# Altium PCB 0-PCB1.PcbDoc
Units mil, origin at the board's own origin, x right, y up, seen from the top; angles counter-clockwise.
Board outline 1908.3 x 1908.3 mil, 2 copper layers (Top Layer, Bottom Layer); 29 components, 33 nets, 249 pads, 32 vias.
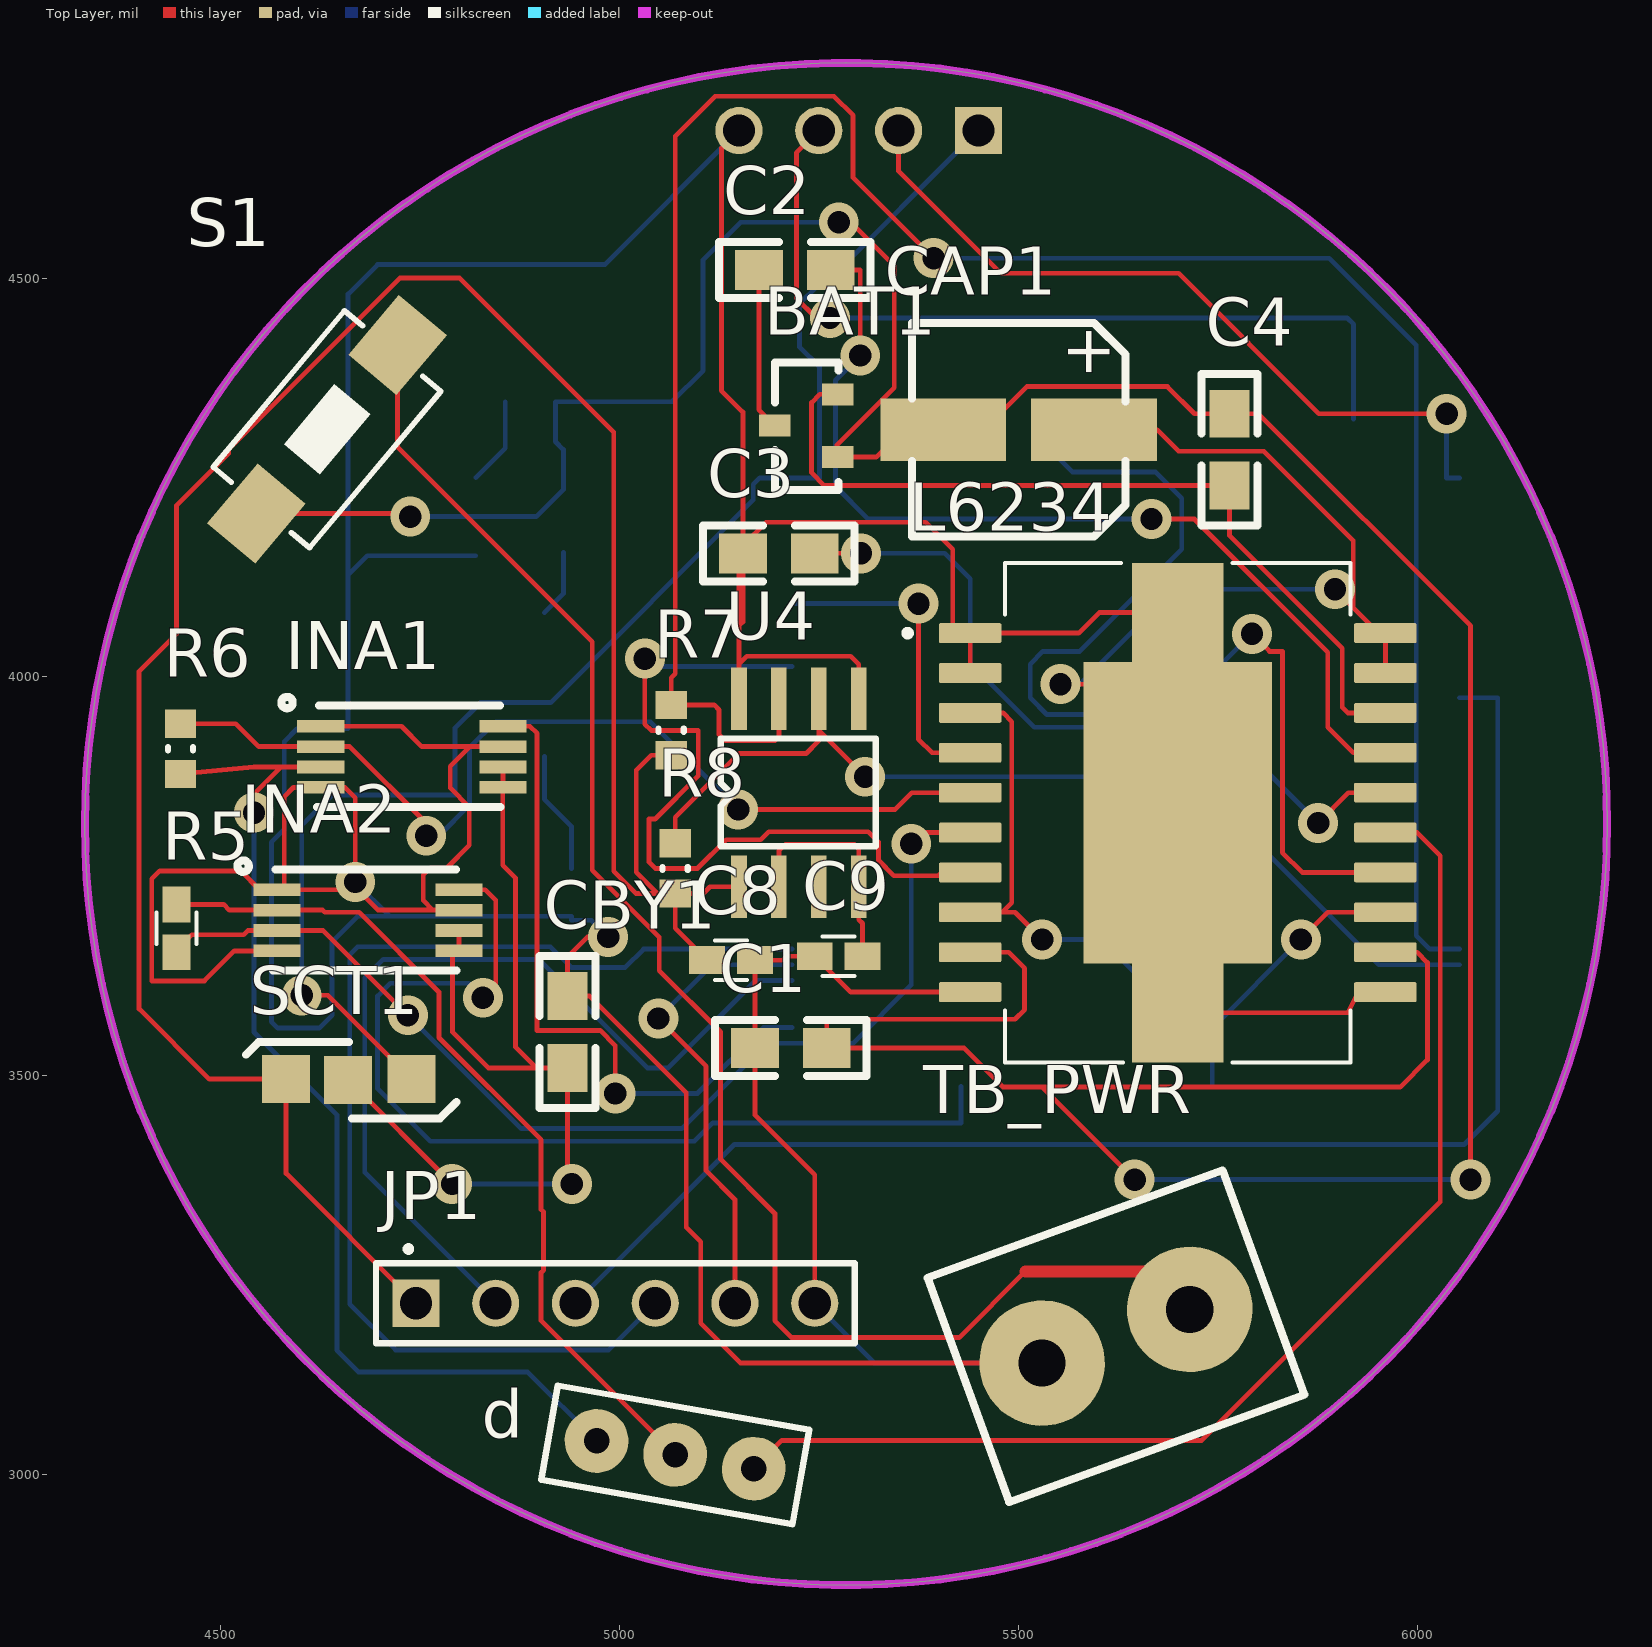
[diagram p0: Top Layer view]
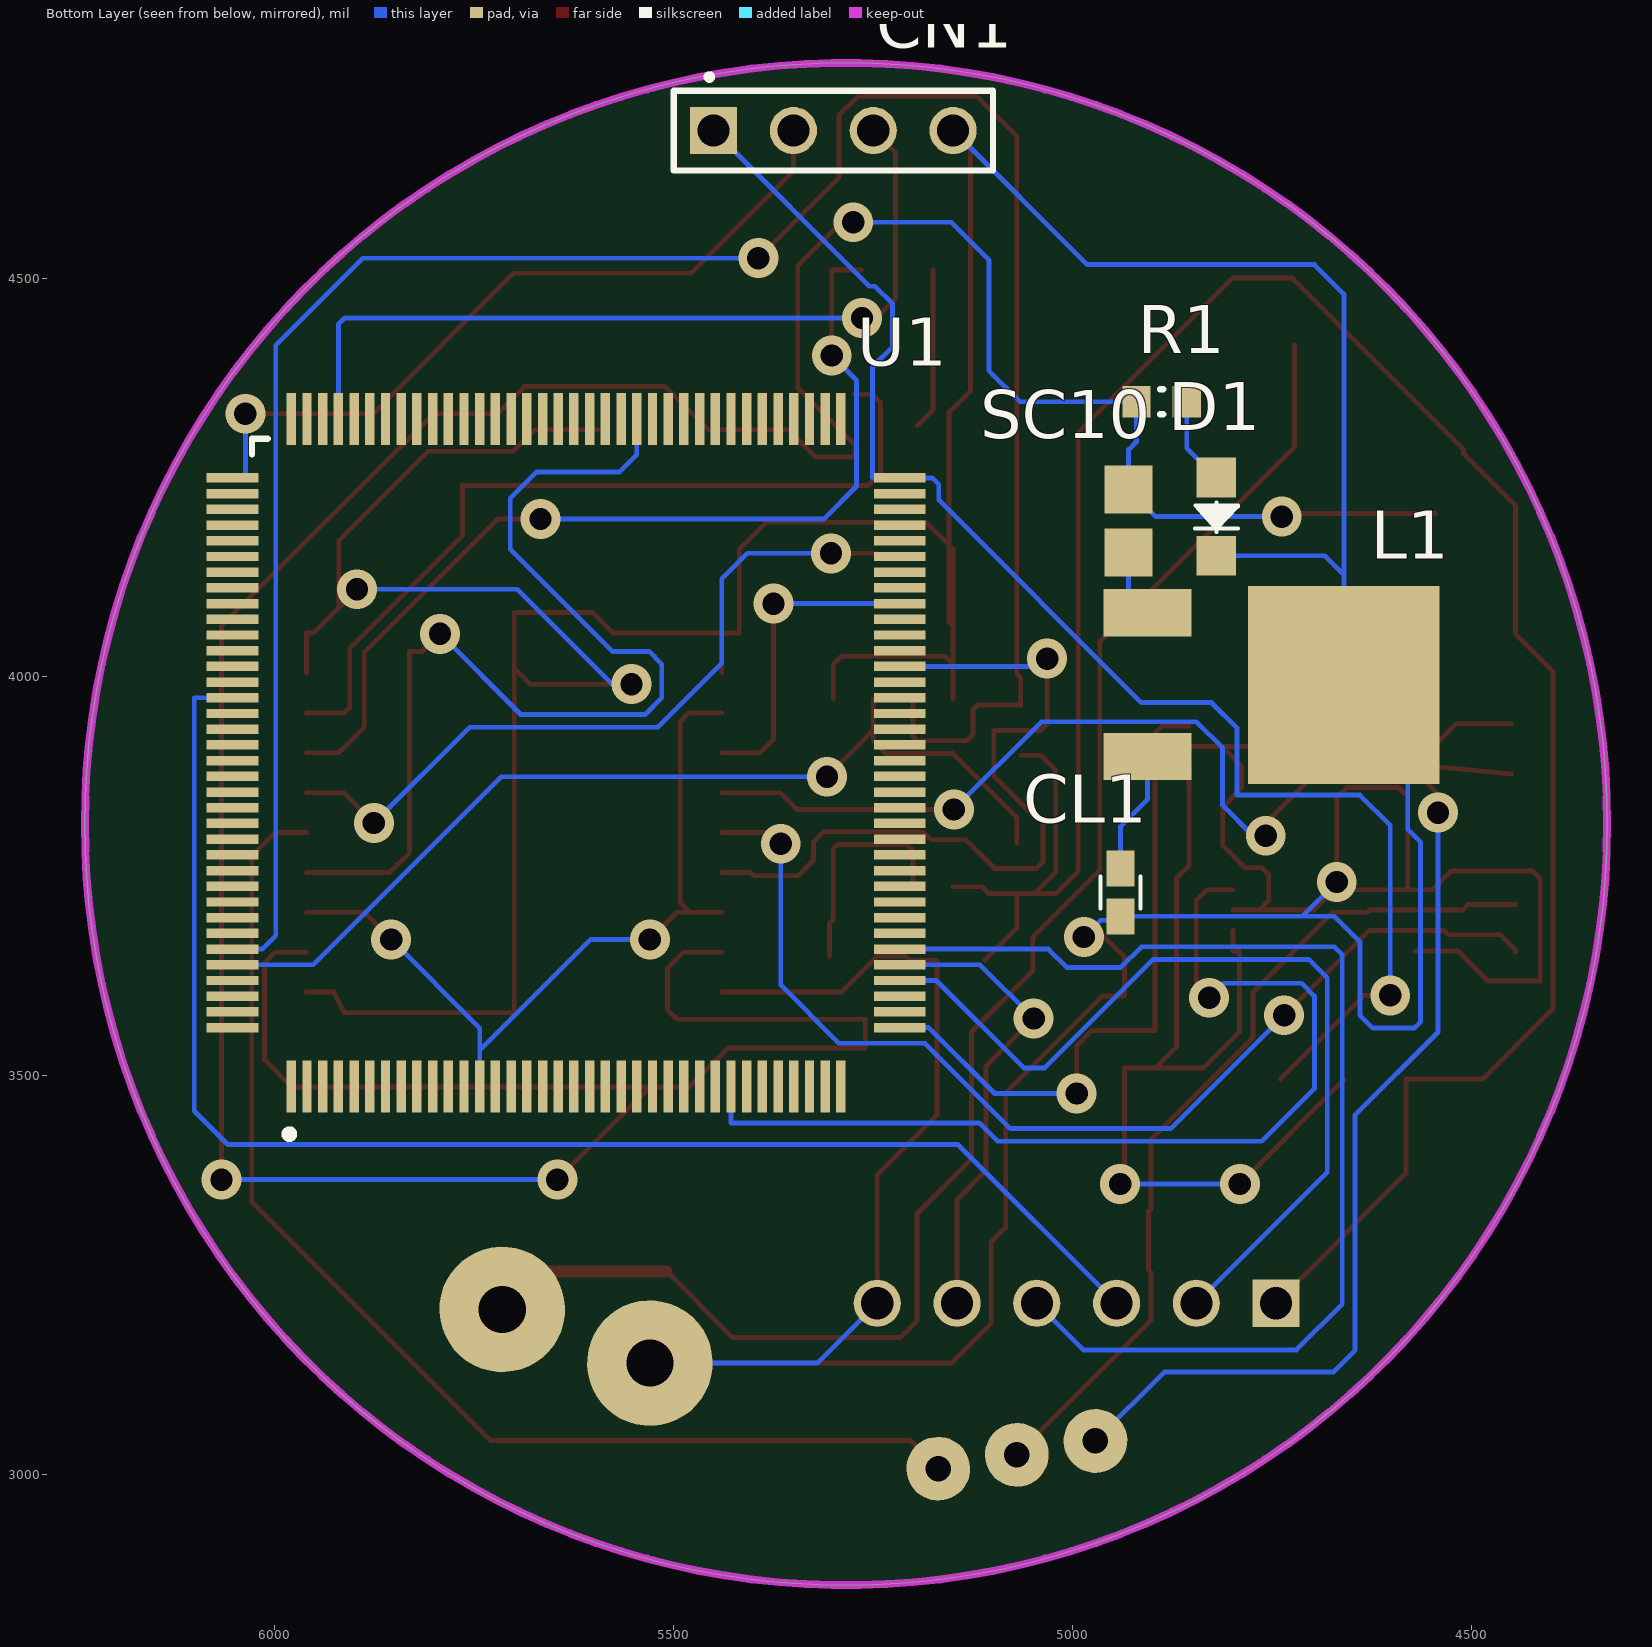
[diagram p1: Bottom Layer view, seen from below]

## Layer stack, top to bottom
Top Solder: solder mask 0.4, Solder Resist, Dk 3.5
Top Layer: signal copper 1.4
Dielectric 1: dielectric 12.6, FR-4, Dk 4.8
Bottom Layer: signal copper 1.4
Bottom Solder: solder mask 0.4, Solder Resist, Dk 3.5

## Board outline
4330,3815.73 ccw(c5284.15,3815.73) 5284.15,2861.58 ccw(c5284.15,3815.73) 6238.3,3815.73 ccw(c5284.15,3815.73) 5284.15,4769.89 ccw(c5284.15,3815.73)

## Design rules (kind name [scope] priority, off if disabled: settings)
Clearance [All] p1: gap=10 ignorepadtopadclearanceinfootprint=FALSE except(0: Arc-Hole Track-Hole SMDPad-Hole THPad-Hole Via-Hole Fill-Hole Poly-Hole Region-Hole Text-Hole)
PolygonConnect [All] p1: connectstyle=Relief reliefconductorwidth=10 reliefentries=4 polygonreliefangle="90 Angle" airgapwidth=10
RoutingVias [All] p1: holewidth=28 width=50 viastyle="Through Hole" minholewidth=28 minwidth=50 maxholewidth=28 maxwidth=50
SolderMaskExpansion [All] p1: expansion=4
Width [All] p1: maxlimit=20 minlimit=6 preferedwidth=6 minimp=50.000000 maximp=50.000000 favimp=50.000000
30 further rules are at their usual default settings.

## Components (designator, comment, footprint, x,y, rotation, side; value= is the part's Value field where it differs from the comment)
BAT1 "BAT54S" BAT54s 5195,4354.37 r0 top
C1 "100nF" C0805 5260,3535 r180 top
C2 "10nF" C0805 5175,4510 r0 top
C3 "1μF" C0805 5245,4155 r180 top
C4 "220nF" C0805 5765,4330 r270 top
C8 "100nF" R/C-0603 5110,3645 r0 top
C9 "1μF" R/C-0603 5305,3650 r180 top
CAP1 "EEH-ZA1E101XP" EEH-ZA1E101XP 5366.65,4176.14 r0 top
CBY1 "0.1μF" C0805 4935,3510 r90 top
CL1 "0.1μF" R/C-0603 4940,3760 r270 bottom
CN1 "SWD" HDR_1x4_2R54_V_M 5450,4685 r180 bottom
d "TB002-500-03BE" 10.7MHZ 5168.48,3007.64 r170 top
D1 "LED" D0805+ 4820,4250 r270 bottom
INA1 "INA240A1" INA240 4740,3900 r270 top
INA2 "INA240A2" INA240 4685,3695 r270 top
JP1 "SPI1" HDR_1x6_2R54_V_M 4745,3215 r0 top
L1 "l78M08" L7805 4644.25,3990 r180 bottom
L6234 "L6234PD013TR" SOIC127P1420X360-21N 5700,3830 r0 top
R1 "2K" 0603R 4888.5,4345 r180 bottom
R5 "10mOhm" R/C-0603 4445,3655 r90 top
R6 "10mOhm" 0603R 4450,3910 r270 top value=1K
R7 "4.7KOhm" 0603R 5065,3933.5 r270 top
R8 "4.7kOhm" 0603R 5070,3760 r270 top
S1 "SW SPST" SW_PB2_A1 4632.16,4308.87 r320 top
SC10 "solder_connection" solder_connection 4930,4235 r270 bottom
SCT1 "solder_connection_tripple" solder_connection_tripple 4660.98,3495.98 r180 top
TB_PWR "TB002-500-02BE" TB002-500-02BE 5530,3140 r20 top
U1 "MCU_LQFP144" LQFP144_0R5_SKT 5635,3905 r180 bottom
U4 "AS5600" "SOIC 8" 5225,3855 r90 top

## Footprints (in the part's own frame and the unit in brackets; to place one, negate y for a bottom-side part, rotate by r counter-clockwise, add the part's x,y. Pads: shape width x height; smd on the part's side, far side on the other; paste and mask are expansions set on the pad)
10.7MHZ [mil]
  round 80 hole 32: 1(0,0) 2(200,0) 3(100,0)
  silkscreen extent -60,-60 260,60
0603R [mm] "Chip Resistor, Body 1.6x0.8mm, IPC Medium Density"
  rect 0.9x1 smd: 1(-0.8,0) 2(0.8,0)
  silkscreen extent -0.05,-0.4 0.05,0.4, body extent -0.85,-0.47 0.85,0.47, height 0.6
BAT54s [mm]
  rect 1x0.7 smd: 1(2,-2) 2(2,0) 3(0,-1)
  silkscreen extent 0,-3.05 2.03,1.02, body extent -0.46,-2.48 2.46,0.44, height 1
C0805 [mil]
  rect 60x50 smd: 1(0,0) 2(90,0)
  silkscreen extent -50,-35 140,35
D0805+ [mil]
  rect 50x50 smd: A(0,0) K(98,0)
  silkscreen extent 31,-27 68,27
EEH-ZA1E101XP [mm]
  rect 4x2 smd: 1(1,3.4) 2(5.8,3.4)
  silkscreen extent 0,0 6.8,6.8, body extent -0.3,0.2 7,6.8, height 7.7
HDR_1x4_2R54_V_M [mm] "Male Header, Pitch 2.54mm, 4x1 Position, Mated Height 6mm, Tail Length 3mm"
  rect 1.5x1.5 hole 1.02: 1(0,0)
  round 1.5 hole 1.02: 2(2.54,0) 3(5.08,0) 4(7.62,0)
  silkscreen extent -1.27,-1.27 8.89,1.76, body extent -1.27,-1.27 8.89,1.27, height 9
HDR_1x6_2R54_V_M [mm] "Male Header, Pitch 2.54mm, 6x1 Position, Mated Height 6mm, Tail Length 3mm"
  rect 1.5x1.5 hole 1.02: 1(0,0)
  round 1.5 hole 1.02: 2(2.54,0) 3(5.08,0) 4(7.62,0) 5(10.16,0) 6(12.7,0)
  silkscreen extent -1.27,-1.27 13.97,1.79, body extent -1.27,-1.27 13.97,1.27, height 9
INA240 [mm]
  rect 0.4x1.5 smd mask+0.05: 1(-0.975,-2.9) 2(-0.325,-2.9) 3(0.325,-2.9) 4(0.975,-2.9) 5(0.975,2.9) 6(0.325,2.9) 7(-0.325,2.9) 8(-0.975,2.9)
  silkscreen extent -1.91,-4.16 1.6,2.82, body extent -1.5,-3.3 1.5,3.3, height 1.2
L7805 [mm] "l7805"
  rect 2.8x1.5 smd: 1(-6.65,2.3) 3(-6.65,-2.272)
  rect 6.1x6.3 smd: 2(-0.4,0)
  body extent -7.66,-3.3 2.06,3.1, height 2.3
LQFP144_0R5_SKT [mm] "32-bit MCU ARM-based Cortex-M3 20 X 20mm, 0.5mm Pitch, 1.6mm Max thickness"
  rect 0.3x1.65 smd: 1(-8.75,-10.625) 2(-8.25,-10.625) 3(-7.75,-10.625) 4(-7.25,-10.625) 5(-6.75,-10.625) 6(-6.25,-10.625) 7(-5.75,-10.625) 8(-5.25,-10.625) 9(-4.75,-10.625) 10(-4.25,-10.625) 11(-3.75,-10.625) 12(-3.25,-10.625) 13(-2.75,-10.625) 14(-2.25,-10.625) 15(-1.75,-10.625) 16(-1.25,-10.625) 17(-0.75,-10.625) 18(-0.25,-10.625) 19(0.25,-10.625) 20(0.75,-10.625) 21(1.25,-10.625) 22(1.75,-10.625) 23(2.25,-10.625) 24(2.75,-10.625) 25(3.25,-10.625) 26(3.75,-10.625) 27(4.25,-10.625) 28(4.75,-10.625) 29(5.25,-10.625) 30(5.75,-10.625) 31(6.25,-10.625) 32(6.75,-10.625) 33(7.25,-10.625) 34(7.75,-10.625) 35(8.25,-10.625) 36(8.75,-10.625) 73(8.75,10.625) 74(8.25,10.625) 75(7.75,10.625) 76(7.25,10.625) 77(6.75,10.625) 78(6.25,10.625) 79(5.75,10.625) 80(5.25,10.625) 81(4.75,10.625) 82(4.25,10.625) 83(3.75,10.625) 84(3.25,10.625) 85(2.75,10.625) 86(2.25,10.625) 87(1.75,10.625) 88(1.25,10.625) 89(0.75,10.625) 90(0.25,10.625) 91(-0.25,10.625) 92(-0.75,10.625) 93(-1.25,10.625) 94(-1.75,10.625) 95(-2.25,10.625) 96(-2.75,10.625) 97(-3.25,10.625) 98(-3.75,10.625) 99(-4.25,10.625) 100(-4.75,10.625) 101(-5.25,10.625) 102(-5.75,10.625) 103(-6.25,10.625) 104(-6.75,10.625) 105(-7.25,10.625) 106(-7.75,10.625) 107(-8.25,10.625) 108(-8.75,10.625)
  rect 1.65x0.3 smd: 37(10.625,-8.75) 38(10.625,-8.25) 39(10.625,-7.75) 40(10.625,-7.25) 41(10.625,-6.75) 42(10.625,-6.25) 43(10.625,-5.75) 44(10.625,-5.25) 45(10.625,-4.75) 46(10.625,-4.25) 47(10.625,-3.75) 48(10.625,-3.25) 49(10.625,-2.75) 50(10.625,-2.25) 51(10.625,-1.75) 52(10.625,-1.25) 53(10.625,-0.75) 54(10.625,-0.25) 55(10.625,0.25) 56(10.625,0.75) 57(10.625,1.25) 58(10.625,1.75) 59(10.625,2.25) 60(10.625,2.75) 61(10.625,3.25) 62(10.625,3.75) 63(10.625,4.25) 64(10.625,4.75) 65(10.625,5.25) 66(10.625,5.75) 67(10.625,6.25) 68(10.625,6.75) 69(10.625,7.25) 70(10.625,7.75) 71(10.625,8.25) 72(10.625,8.75) 109(-10.625,8.75) 110(-10.625,8.25) 111(-10.625,7.75) 112(-10.625,7.25) 113(-10.625,6.75) 114(-10.625,6.25) 115(-10.625,5.75) 116(-10.625,5.25) 117(-10.625,4.75) 118(-10.625,4.25) 119(-10.625,3.75) 120(-10.625,3.25) 121(-10.625,2.75) 122(-10.625,2.25) 123(-10.625,1.75) 124(-10.625,1.25) 125(-10.625,0.75) 126(-10.625,0.25) 127(-10.625,-0.25) 128(-10.625,-0.75) 129(-10.625,-1.25) 130(-10.625,-1.75) 131(-10.625,-2.25) 132(-10.625,-2.75) 133(-10.625,-3.25) 134(-10.625,-3.75) 135(-10.625,-4.25) 136(-10.625,-4.75) 137(-10.625,-5.25) 138(-10.625,-5.75) 139(-10.625,-6.25) 140(-10.625,-6.75) 141(-10.625,-7.25) 142(-10.625,-7.75) 143(-10.625,-8.25) 144(-10.625,-8.75)
  silkscreen extent -10,-12.27 -8.69,10
R/C-0603 [mil]
  rect 45x35 smd: 1(0,0) 2(60,0)
  silkscreen extent 10,-25 50,25
SOIC127P1420X360-21N [mm]
  rrect16% 1.99x0.63 smd: 1(-6.61,5.715) 2(-6.61,4.445) 3(-6.61,3.175) 4(-6.61,1.905) 5(-6.61,0.635) 6(-6.61,-0.635) 7(-6.61,-1.905) 8(-6.61,-3.175) 9(-6.61,-4.445) 10(-6.61,-5.715) 11(6.61,-5.715) 12(6.61,-4.445) 13(6.61,-3.175) 14(6.61,-1.905) 15(6.61,-0.635) 16(6.61,0.635) 17(6.61,1.905) 18(6.61,3.175) 19(6.61,4.445) 20(6.61,5.715)
  rect 6x9.6 smd paste-6: 21(0,0)
  rect 2.9x3.15 smd paste-3: 22(0,6.375) 23(0,-6.375)
  silkscreen extent -8.7,-7.95 5.5,7.95
"SOIC 8" [mm]
  rect 2x0.5 smd: 1(-2.993,1.905) 2(-2.993,0.635) 3(-2.993,-0.635) 4(-2.993,-1.905) 5(2.993,-1.905) 6(2.993,-0.635) 7(2.993,0.635) 8(2.993,1.905)
  silkscreen extent -1.71,-2.45 1.72,2.48
solder_connection [mil]
  rect 60x60 smd: 1(0,0) 2(78.74,0)
solder_connection_tripple [mil]
  rect 60x60 smd: 1(0.98,0.98) 2(78.74,0) 3(-78.74,0)
  Top Layer region: -28.54,34.45
  silkscreen extent -135,-46 129,49
SW_PB2_A1 [mm]
  rect 2x2.5 smd: 1(0,3.556) 2(0,-3.444)
  silkscreen extent -2,-3.19 2,3.31, body extent -2.03,-3.18 2.03,3.3, height 1.2
TB002-500-02BE [mm] "TB002-500-02BE"
  round 4 hole 1.5: 1(0,0) 2(5,0)
  silkscreen extent -2.5,-3.8 7.5,3.8, body extent -2.5,-4.4 7.5,4.6, height 13.55

## Part data
BAT1: Supplier Part Number 1=512-BAT54S, Supplier 1=Mouser
C1 C2 C3 C4 CBY1: library part CAP_1
C8 C9 CL1: library part CAP, "Capacitor"
CAP1: Supplier Part Number 1=667-EEH-ZA1E101XP, Supplier 1=Mouser
CN1: library part "Header 4", "Header, 4-Pin, Single row", Publisher="Altium Limited", Revision="17-Jul-2002: Re-released for DXP Platform."
d: Supplier Part Number 1=490-TB002-500-03BE, Supplier 1=Mouser
INA1 INA2: library part INA240, Supplier Part Number 1=595-INA240A2PWR, Supplier 1=Mouser
JP1: library part "HEADER 6"
L6234: "Motor Driver BiCDMOS Parallel PowerSO-20", Package="SO-20 STMicroelectronics", Digi-Key_Part_Number=497-5352-1-ND, Digi-Key_Purchase_URL=https://www.digikey.com/product-detail/en/stmicroelectronics/L6234PD013TR/497-5352-1-ND/1154483?utm_source=snapeda&utm_medium=aggregator&utm_campaign=symbol, MF=STMicroelectronics, MP=L6234PD013TR, SnapEDA_Link=https://www.snapeda.com/parts/L6234PD013TR/STMicroelectronics/view-part/75337/?ref=snap
R1: library part RES1
R5 R7 R8: library part RES2
R6: library part Res1, "Resistor", Ordered by=Subcon, Published=8-Jun-2000, Publisher="Altium Limited", Revision="July-2002: Re-released for DXP Platform."
TB_PWR: Supplier Part Number 1=490-TB002-500-02BE, Supplier 1=Mouser

## Via types
v1: diameter 50, hole 28, Top Layer to Bottom Layer, 32 vias

## Nets (pads, with @x,y where several pads share a name; then routed paths per layer and width w, separated by ;. In a path a pad name is that pad's centre, name@x,y a point inside that pad or via, vN(x,y) a via of type N, cw(c..) or ccw(c..) an arc to the next point about the centre after c; other vN are vias at no path point)
+3.3: CN1.1 SCT1.3 U1.72 | length 1827.1
  Top Layer w6: v1(4602,3601) 4634.71,3601 SCT1.3
  Bottom Layer w6: v1(4602,3601) 4602,3814 4640,3852 4794,3852 4794,3936 4826,3968 4914,3968 5168,4222 5168,4241.49 5176,4249.49 U1.72 5251,4249.49 5251,4388.59 5225.78,4413.81 5225.78,4467.59 5248,4489.81 5254.81,4489.81 CN1.1
+5: C8.1 JP1.1 R7.2 R8.2 SCT1.2 U4.1 | length 3008.5
  Top Layer w6: JP1.1 4582.24,3377.76 SCT1.2 4486.02,3495.98 4398,3584 4398,4007 4445,4054 4445,4215 4510,4280 4510,4285 4725,4500 4800,4500 4993,4307 4993,3756.51 5021,3728.51 5048,3728.51 ; R7.2 5040,3902.01 5021.31,3883.32 5021.31,3755.19 5048,3728.51 ; C8.1 5070,3685 R8.2 ; U4.1 5113.66,3737.17 5105,3728.51 R8.2 ; 5048,3728.51 R8.2
GND: C1.2 C3.2 C8.2 C9.2 CAP1.2 CBY1.2 CL1.2 CN1.4 D1.K INA1.1 INA1.4 INA1.7 INA2.1 INA2.4 INA2.7 JP1.6 L1.2 L6234.1 L6234.2 L6234.10 L6234.11 L6234.19 L6234.20 L6234.21 L6234.22 L6234.23 TB_PWR.1 U4.5 U4.8 | length 9710.5
  Top Layer w6: INA2.4 4517.61,3656.61 4480,3619 4414,3619 4414,3747 4424,3757 4525.39,3757 4549,3733.39 INA2.1 INA2.1@4580,3733.39 ; INA1.1 4727,3938.39 4752.59,3912.8 4812.8,3912.8 ; v1(4669,3743) 4669,3848.61 4656,3861.61 INA1.4 4591.61,3861.61 4580,3850 INA2.1@4580,3733.39 ; INA2.7 4766.41,3707.8 ; INA1.7 4812.8,3912.8 ; v1(4986,3674) 4960,3674 4935,3649 CBY1.2 4963,3600 5084,3479 5084,3310 5102,3292 5102,3190 5152,3140 TB_PWR.1 ; U4.8 5150,4016 ; CN1.4 5128,4663 5128,4359 5155,4332 C3.2@5155,4165 ; JP1.6 5245,3376 5170,3451 C1.2 C8.2 5205,3645 5210,3650 C9.2 5290,3605 L6234.10 ; U4.5 5300,4016 5290,4026 5160,4026 5150,4016 ; L6234.2 L6234.1 ; v1(5553,3991) 5680,3991 L6234.21@5700,4011 ; CAP1.2 5674,4310 5701,4283 5808,4283 5920,4171 5920,4087 ; v1(5897,4110) 5920,4087 ; L6234.11 5926,3605 5913.42,3579.01 L6234.23 L6234.21 L6234.21@5700,4011 ; L6234.19 L6234.20 5952,4055 5920,4087 ; INA2.1@4580,3733.39 4672,3733.39 4697.59,3707.8 4766.41,3707.8 ; 4766.41,3707.8 4754.2,3720 4754.2,3752 4763.2,3761 4784,3761 4812,3789 4812,3837 4788,3861 4788,3888 4812.8,3912.8 ; 5150,4016 5150,4064 ; 5150,4064 5150,4160 C3.2@5155,4165 ; 5150,4064 5155,4069 C3.2 C3.2@5155,4165 ; C3.2@5155,4165 5184,4194 5384,4194 5418,4160 5418,4055 L6234.1 ; L6234.1 5576.02,4055 5602,4080.98 L6234.22 L6234.21@5700,4011
  Bottom Layer w6: v1(4669,3743) 4712,3700 ; D1.K 4684,4152 4660,4128 ; v1(4986,3674) 4965,3695 4940,3695 CL1.2 4712,3700 ; CN1.4 4982,4517 4697,4517 4660,4480 4660,4128 ; JP1.6 5320,3140 TB_PWR.1 ; v1(5553,3991) 5577,3991 5696,4110 v1(5897,4110) ; 4660,4128 L1.2 4660,3935 4596,3935 4580,3919 4580,3808.98 4564,3792.98 4564,3568 4572,3560 4624,3560 4640,3576 4640,3668 4672,3700 4712,3700
NetBAT1_2: BAT1.2 C4.2 L6234.18 | length 1049.2
  Top Layer w6: BAT1.2 5251.37,4354.37 5241,4344 5241,4256 5257,4240 C4.2 5765,4177 5906.19,4035.81 5906.19,3961.81 5913,3955 L6234.18
NetBAT1_3: BAT1.3 C2.1 | length 203.3
  Top Layer w6: C2.1 5175,4335 BAT1.3
NetC2_2: C2.2 L6234.17 | length 1203.5
  Top Layer w6: C2.2 5302,4510 v1(5302,4403) ; v1(5667,4198) 5721,4198 5888,4031 5888,3937 5920,3905 L6234.17
  Bottom Layer w6: v1(5302,4403) 5271,4372 5271,4239 5312,4198 v1(5667,4198)
NetC3_1: C3.1 L6234.16 | length 933.1
  Top Layer w6: C3.1 v1(5303,4155) ; v1(5876,3817) 5914,3855 L6234.16
  Bottom Layer w6: v1(5303,4155) 5408,4155 5440,4123 5440,4017 5520,3937 5756,3937 v1(5876,3817)
NetC9_1: C9.1 U4.2 U4.4 | length 287.1
  Top Layer w6: U4.2 5200,3782 5208,3790 5294.64,3790 5300,3784.64 U4.4 5300,3696 5305,3691 C9.1
NetCBY1_1: CBY1.1 INA1.5 INA1.6 INA2.5 INA2.6 SCT1.1 | length 1175.1
  Top Layer w6: SCT1.1 v1(4790.5,3364.5) ; INA2.6 INA2.5 4791,3656.61 4791,3554.98 4835.98,3510 4896,3510 ; INA1.6 INA1.5 4854,3861.61 4854,3764 4870,3748 4870,3536 4896,3510 ; v1(4940.5,3364.5) 4935,3370 CBY1.1 4896,3510
  Bottom Layer w6: v1(4790.5,3364.5) v1(4940.5,3364.5)
NetCL1_1: CL1.1 L1.3 | length 154.6
  Bottom Layer w6: L1.3 4906.06,3846.94 4940,3813 CL1.1
NetCN1_2: CN1.2 U1.109 | length 960.7
  Top Layer w6: CN1.2 5350,4634 5478,4506 5701,4506 5877,4330 v1(6037,4330)
  Bottom Layer w6: v1(6037,4330) 6037,4249.49 U1.109
NetCN1_3: CN1.3 U1.105 | length 1052.4
  Top Layer w6: CN1.3 5222,4657 5222,4475 5247,4450 v1(5264,4450)
  Bottom Layer w6: v1(5264,4450) 5912.43,4450 5920.43,4442 U1.105
NetD1_A: D1.A R1.2 | length 110.3
  Bottom Layer w6: D1.A 4857.01,4287.01 R1.2
Netd_1: d.1 L6234.15 | length 1513.8
  Top Layer w6: d.1 5203.84,3043 5730,3043 6029,3342 6029,3776 6000,3805 L6234.15
Netd_2: d.2 INA1.3 R6.2 | length 1337.2
  Top Layer w6: R6.2 4541.7,3887.2 4576,3887.2 ; v1(4542,3830) 4542,3853.2 4576,3887.2 ; INA1.3 4576,3887.2
  Bottom Layer w6: v1(4542,3830) 4542,3555 4646,3451 4646,3156 4673,3129 4884.89,3129 d.2
Netd_3: d.3 INA2.2 R5.2 | length 1079.7
  Top Layer w6: R5.2 4504,3715 4511.2,3707.8 INA2.2 4628.2,3707.8 4631,3705 4674,3705 4774,3605 4774,3548 4902,3420 4902,3332.46 4905,3329.46 4905,3256.46 4902,3253.46 4902,3193 d.3
NetINA1_2: INA1.2 L6234.5 R6.1 | length 1213
  Top Layer w6: R6.1 4519.3,3941.5 4548,3912.8 INA1.2 4662.2,3912.8 4758,3817 v1(4758,3801) ; v1(5149,3834) 5345.69,3834 5366.69,3855 L6234.5
  Bottom Layer w6: v1(4758,3801) 4774,3801 4812.17,3839.17 4812.17,3911.17 4845,3944 5039,3944 v1(5149,3834)
NetINA1_8: INA1.8 U1.37 | length 840.7
  Top Layer w6: INA1.8 4888,3938.39 4897,3929.39 4897,3557 4976,3557 4995,3538 v1(4995,3478)
  Bottom Layer w6: v1(4995,3478) 5098,3478 5180.51,3560.51 U1.37
NetINA2_3: INA2.3 L6234.6 R5.1 | length 1368
  Top Layer w6: R5.1 4445,3658 4464,3677 4529,3677 4534.2,3682.2 INA2.3 4628.8,3682.2 v1(4735,3576) ; v1(5366,3791) 5380,3805 L6234.6
  Bottom Layer w6: v1(4735,3576) 4877,3434 5078.15,3434 5185.15,3541 5293,3541 5366,3614 v1(5366,3791)
NetINA2_8: INA2.8 U1.29 | length 1256.2
  Top Layer w6: INA2.8 4832,3733.39 4845,3720.39 4845,3614 v1(4829,3598)
  Bottom Layer w6: v1(4829,3598) 4811,3616 4713,3616 4697,3600 4697,3484 4763,3418 5094.15,3418 5117.15,3441 5428.31,3441 U1.29
NetJP1_2: JP1.2 U1.40 | length 1122.9
  Bottom Layer w6: JP1.2 4681,3379 4681,3623 4704,3646 4899,3646 5035,3510 5061.43,3510 5171,3619.57 U1.40
NetJP1_3: JP1.3 U1.123 | length 1821.4
  Bottom Layer w6: JP1.3 5144,3414 6059,3414 6101,3456 6101,3973.9 U1.123
NetJP1_4: JP1.4 U1.42 | length 1448.2
  Bottom Layer w6: JP1.4 4986.47,3156.47 4719.53,3156.47 4662,3214 4662,3652 4672,3662 4913.63,3662 4939.63,3636 5007.57,3636 5030.5,3658.94 U1.42
NetJP1_5: JP1.5 U1.41 | length 592.3
  Top Layer w6: v1(5049,3572) 5108.81,3512.19 5108.81,3381.19 5145,3345 JP1.5
  Bottom Layer w6: v1(5049,3572) 5116.25,3639.25 U1.41
NetL1_1: L1.1 SC10.2 | length 85.6
  Bottom Layer w6: L1.1 4930,4104.49 SC10.2
NetL6234_3: L6234.3 L6234.8 L6234.13 U1.13 | length 1026.3
  Top Layer w6: L6234.8 5480,3705 ; L6234.3 5481,3955 5492,3944 5492,3717 5480,3705 ; v1(5530,3671) 5496,3705 5480,3705 ; v1(5854.27,3671) 5888.27,3705 L6234.13
  Bottom Layer w6: v1(5530,3671) 5604.27,3671 5743.27,3532 ; U1.13 5743.27,3532 ; v1(5854.27,3671) 5743.27,3560 5743.27,3532
NetL6234_4: L6234.4 U1.64 | length 400.1
  Top Layer w6: v1(5375,4092.01) 5375,3922 5392,3905 L6234.4
  Bottom Layer w6: U1.64 v1(5375,4092.01)
NetL6234_7: L6234.7 U1.60 | length 998.8
  Top Layer w6: v1(5032,4023) 5032,3941 5040,3933 5099,3933 5099,3876 5045,3822 5037.31,3822 5037.31,3768 5045.31,3760 5098,3760 5134,3796 5177.21,3796 5187.21,3806 5312,3806 5325,3793 5325,3770 5344,3751 5400,3751 5404,3755 L6234.7
  Bottom Layer w6: v1(5032,4023) 5041.73,4013.27 U1.60
NetL6234_14: L6234.14 U1.86 | length 1348.9
  Top Layer w6: v1(5793,4054) 5815.02,4031.98 5831.11,4031.98 5831.11,3779.89 5856,3755 L6234.14
  Bottom Layer w6: U1.86 5546.42,4278.58 5568,4257 5672,4257 5705,4224 5705,4160 5577,4032 5531,4032 5515,4016 5515,3974 5536,3953 5692,3953 v1(5793,4054)
NetR7_1: R7.1 U1.139 U4.7 | length 2862.7
  Top Layer w6: U4.7 5200,3925 5195,3920 5133,3920 5125.13,3927.87 5125.13,3958.64 5118.77,3965 R7.1 5065,3999 5070,4004 5070,4678 5120,4728 5269,4728 5293,4704 5293,4626 v1(5394,4525)
  Bottom Layer w6: v1(5394,4525) 5890,4525 5999,4416 5999,3675.94 6016,3658.94 U1.139
NetR8_1: R8.1 U1.140 U4.6 | length 1230.1
  Top Layer w6: R8.1 5070,3824 5150,3904 5234,3904 5250,3920 5250,3933 ; U4.6 5250,3933 ; v1(5308,3875) 5250,3933
  Bottom Layer w6: v1(5308,3875) 5716.25,3875 5952,3639.25 U1.140
NetS1_1: S1.1 TB_PWR.2 | length 2029.7
  Top Layer w6: S1.1 4722.15,4288 4966,4044.15 4966,3758 5050,3674 5050,3632 5127,3555 5127,3395.5 5195,3327.5 5195,3193 5216,3172 5426,3172 5509,3255 ; TB_PWR.2 TB_PWR.2@5714.98,3255
  Top Layer w15: 5509,3255 TB_PWR.2@5714.98,3255
VCC1: BAT1.1 C1.1 C4.1 CAP1.1 L6234.9 L6234.12 R1.1 S1.2 SC10.1 | length 5025
  Top Layer w6: S1.2 4734,4205 v1(4738,4201) ; v1(5275,4570) 5290,4570 5344.5,4515.5 5344.5,4362.5 5273,4291 5273,4275.63 BAT1.1 5322,4275.63 5356.37,4310 CAP1.1 5457,4310 5511,4364 5687,4364 5721,4330 C4.1 5801,4330 6067,4064 v1(6067,3370) ; L6234.9 5488,3655 5508,3635 5508,3583 5496,3571 5260,3571 C1.1 5432,3535 5481,3486 5530,3486 ; v1(5646,3370) 5530,3486 ; L6234.12 6000,3655 6013,3642 6013,3520 5979,3486 5530,3486
  Bottom Layer w6: v1(4738,4201) 4896,4201 SC10.1 4930,4285 4920,4295 R1.1 5066,4345 5105,4384 5105,4523 5152,4570 v1(5275,4570) ; v1(5646,3370) v1(6067,3370)
pads on no net: U1.1 U1.2 U1.3 U1.4 U1.5 U1.6 U1.7 U1.8 U1.9 U1.10 U1.11 U1.12 U1.14 U1.15 U1.16 U1.17 U1.18 U1.19 U1.20 U1.21 U1.22 U1.23 U1.24 U1.25 U1.26 U1.27 U1.28 U1.30 U1.31 U1.32 U1.33 U1.34 U1.35 U1.36 U1.38 U1.39 U1.43 U1.44 U1.45 U1.46 U1.47 U1.48 U1.49 U1.50 U1.51 U1.52 U1.53 U1.54 U1.55 U1.56 U1.57 U1.58 U1.59 U1.61 U1.62 U1.63 U1.65 U1.66 U1.67 U1.68 U1.69 U1.70 U1.71 U1.73 U1.74 U1.75 U1.76 U1.77 U1.78 U1.79 U1.80 U1.81 U1.82 U1.83 U1.84 U1.85 U1.87 U1.88 U1.89 U1.90 U1.91 U1.92 U1.93 U1.94 U1.95 U1.96 U1.97 U1.98 U1.99 U1.100 U1.101 U1.102 U1.103 U1.104 U1.106 U1.107 U1.108 U1.110 U1.111 U1.112 U1.113 U1.114 U1.115 U1.116 U1.117 U1.118 U1.119 U1.120 U1.121 U1.122 U1.124 U1.125 U1.126 U1.127 U1.128 U1.129 U1.130 U1.131 U1.132 U1.133 U1.134 U1.135 U1.136 U1.137 U1.138 U1.141 U1.142 U1.143 U1.144 U4.3

## Keep-outs
Keep-Out Layer:
  circle w10: c5284.15,3815.73 r954.15

## Text inside footprints (layer, text, board x,y; h text height)
CAP1: Top Overlay "+" at 5614.68,4372.99 h60 r90